# Altium PCB PCB.PcbDoc (part 2 of 2)
Units mm, origin at the board's own origin, x right, y up, seen from the top; angles counter-clockwise.
Board outline 72.26 x 43 mm, 4 copper layers (Top Layer, Int1 (GND), Int2 (PWR), Bottom Layer), stack 1.684 mm thick; 41 components, 43 nets, 235 pads, 199 vias.
Unrouted connection lines stored in the file: 1.
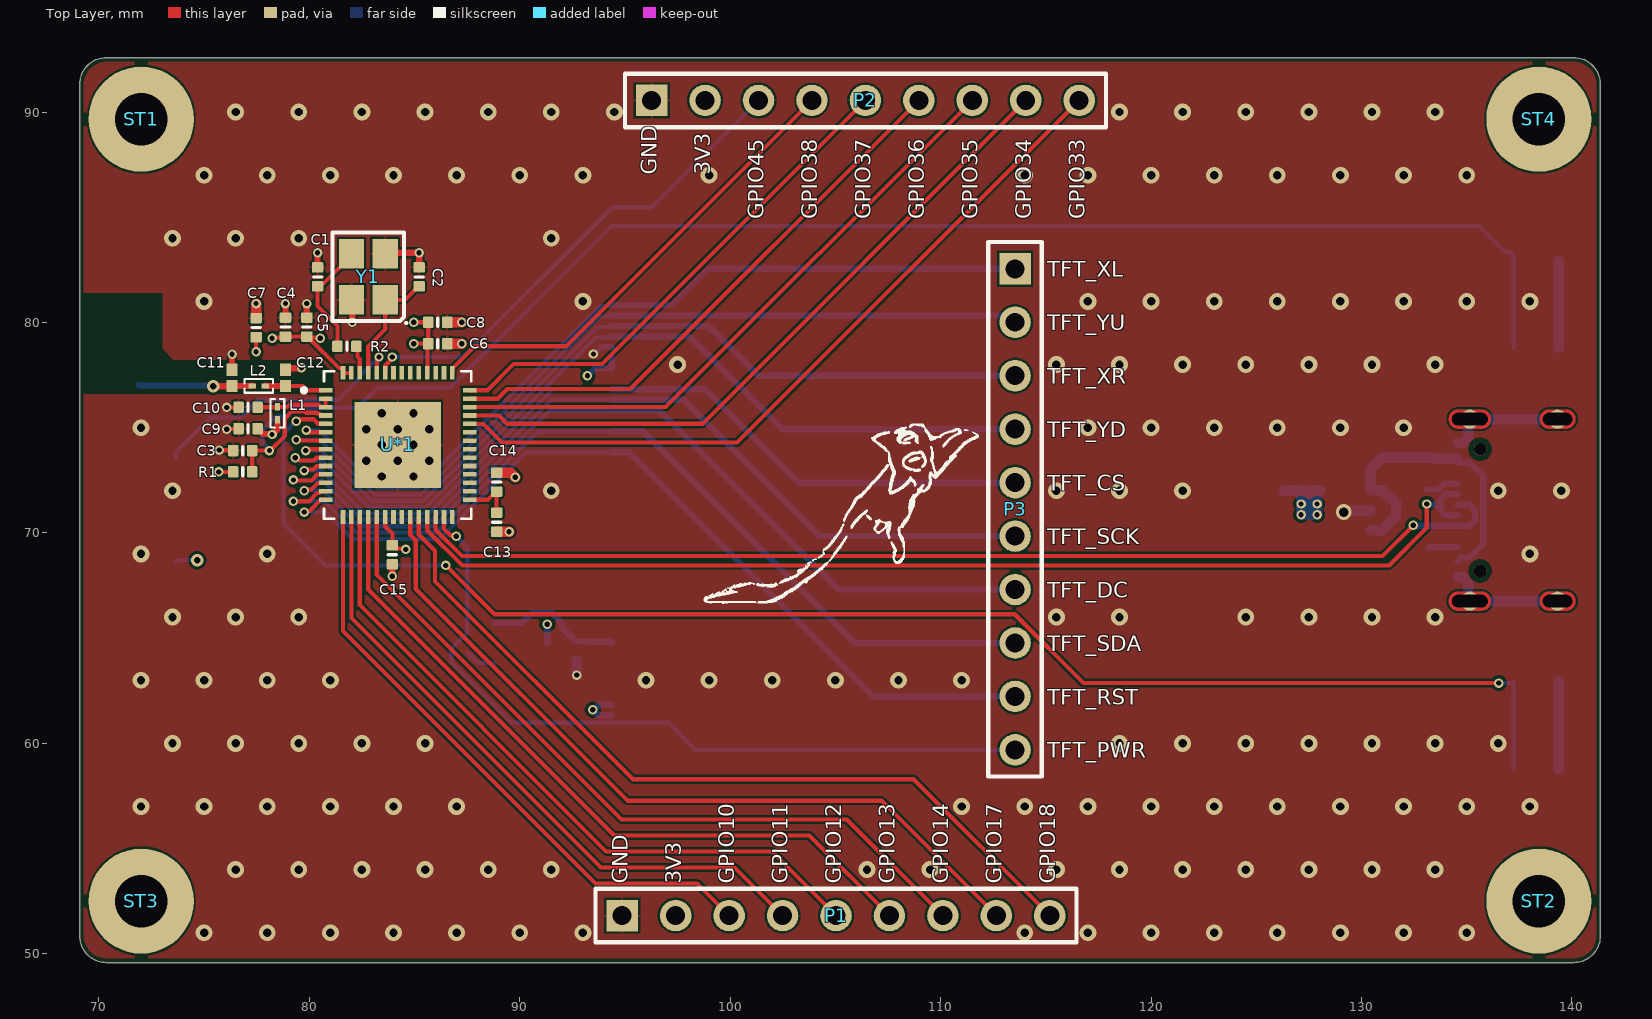
[diagram p0: Top Layer view]

## Silkscreen, mask and mechanical layers (free items; w line width, h text height) (continued)
Top Overlay: (continued)
  text "3V3" at 99.062,87.03 h0.75 r90
  text "GPIO45" at 101.602,84.905 h0.75 r90
  text "GPIO38" at 104.142,84.905 h0.75 r90
  text "GPIO37" at 106.682,84.905 h0.75 r90
  text "GPIO36" at 109.222,84.905 h0.75 r90
  text "GPIO35" at 111.762,84.905 h0.75 r90
  text "GPIO34" at 114.302,84.905 h0.75 r90
  text "GPIO33" at 116.842,84.905 h0.75 r90
  text "TFT_XL" at 115.06,82.165 h0.75
  text "TFT_YU" at 115.06,79.625 h0.75
  text "TFT_XR" at 115.06,77.085 h0.75
  text "TFT_YD" at 115.06,74.545 h0.75
  text "TFT_CS" at 115.06,72.005 h0.75
  text "TFT_SCK" at 115.06,69.465 h0.75
  text "TFT_DC" at 115.06,66.925 h0.75
  text "TFT_SDA" at 115.06,64.385 h0.75
  text "TFT_RST" at 115.06,61.845 h0.75
  text "TFT_PWR" at 115.06,59.305 h0.75
  text "GND" at 95.125,53.338 h0.75 r90
  text "3V3" at 97.665,53.338 h0.75 r90
  text "GPIO10" at 100.205,53.338 h0.75 r90
  text "GPIO11" at 102.745,53.338 h0.75 r90
  text "GPIO12" at 105.285,53.338 h0.75 r90
  text "GPIO13" at 107.825,53.338 h0.75 r90
  text "GPIO14" at 110.365,53.338 h0.75 r90
  text "GPIO17" at 112.905,53.338 h0.75 r90
  text "GPIO18" at 115.445,53.338 h0.75 r90
Bottom Overlay:
  text "RESET" at 136.198,83.232 h1 r90
  text "BOOT" at 136.198,62.666 h1 r90
Mechanical 1:
  lines w0.254: 96.351,71.083 104.738,71.083 ; 138.303,70.866 149.733,70.866 ; 69.088,50.853 ccw(c70.358,50.853) 70.358,49.583 140.081,49.583 ccw(c140.081,50.853) 141.351,50.853 141.351,91.313 ccw(c140.081,91.313) 140.081,92.583 70.358,92.583 ccw(c70.358,91.313) 69.088,91.313 69.088,50.853

## Dimensions
141.351,71.083 to 96.351,71.083 on Mechanical 1
69.088,50.853 to 141.351,50.853 on Mechanical 1
70.358,49.583 to 70.358,71.083 on Mechanical 1
70.358,92.583 to 70.358,49.583 on Mechanical 1
72.009,89.662 to 70.358,92.583 on Mechanical 1

## Text inside footprints (layer, text, board x,y; h text height)
J2: Bottom Assembly "PCB EDGE" at 141.219,65.883 h0.61 r90